# Altium PCB MU-RK3576J-MB.PcbDoc (part 2 of 2)
Units mm, origin at the board's own origin, x right, y up, seen from the top; angles counter-clockwise.
Board outline 110 x 90 mm, 10 copper layers (GTL_TOP_Hi, G1_L2_GND, G2_L3_GND, G3_L4_Hi, G4_L5_GND_PWR, G5_L6_GND_PWR, G6_L7_Hi, G7_L8_GND_PWR, G8_L9_GND, GBL_BOTTOM_Hi), stack 1.848 mm thick; 5 components, 737 nets, 20 pads, 0 vias.
Unrouted connection lines stored in the file: 705.
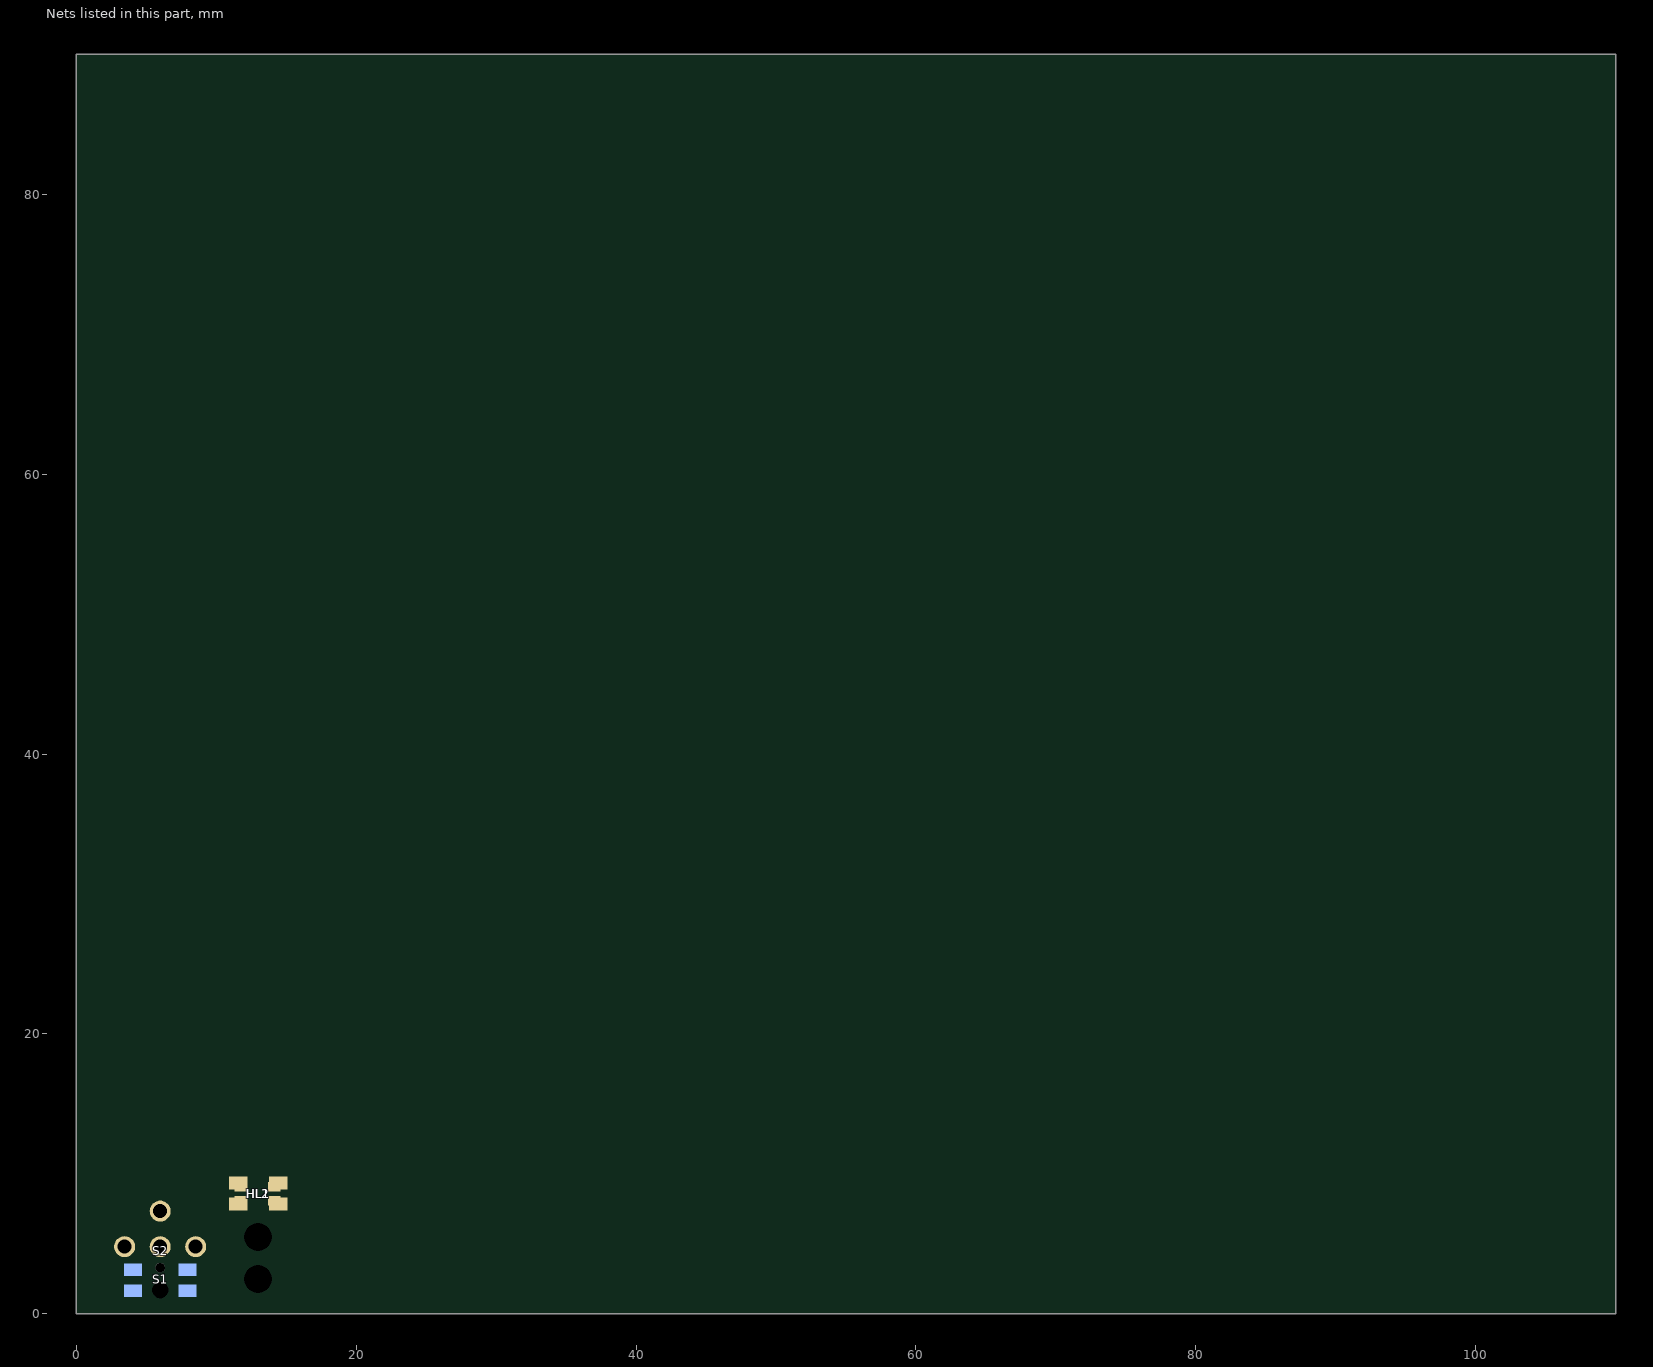
[diagram p2: the nets of this part, all layers, seen from the top]

## Part data
HL1: "20mA 无色透明透镜 -40℃~+85℃ Common anode 正贴 RGB 45mW SMD2835-4P Light Emitting Diodes (LED) ROHS", Manufacturer=XINGLIGHT, Check=False, NameFromManufacturer=XL-B3528RGBC-BM, Part Number=XL-B3528RGBC-BM
HL2: "25mA -30℃~+85℃ 正贴 RGB 120° 1206 Light Emitting Diodes (LED) ROHS", Manufacturer=XINGLIGHT, Check=False, NameFromManufacturer=XL-3216RGBC, Part Number=XL-3216RGBC
S1: "Switch", Manufacturer="KLS Electronic", Temperature=-30°C~70°C, Check=False, ComponentLink1Description=DATASHEET, ComponentLink1URL=https://www.chipdip.ru/product0/8010518403, Datasheet=Datasheets/switch/20150508141012KLS7-TS5401.pdf, Last changed=27.10.2022, NameFromManufacturer=L-KLS7-TS5401-1.35-250-T, Part Number=L-KLS7-TS5401-1.35-250-T, Place=T
S2: Manufacturer="FVWIN Electronics", Check=False, NameFromManufacturer=SW-LEDX4-7-2_54, Part Number=SW-LEDX4-7-2_54
X32: Manufacturer="Kang Yang", Check=False, NameFromManufacturer=LEM-195, Part Number=LEM-195

## Nets (pads, with @x,y where several pads share a name; then routed paths per layer and width w, separated by ;. In a path a pad name is that pad's centre, name@x,y a point inside that pad or via, vN(x,y) a via of type N, cw(c..) or ccw(c..) an arc to the next point about the centre after c; other vN are vias at no path point)
+0.9V_AVDD_MIPI: 
+0.9V_VDD_GPU: 
+0.9V_VDD_GPU_FB: 
+0.9V_VDD_LOGIC: 
+0.9V_VDD_LOGIC_FB: 
+0.9V_VDD_NPU: 
+0.9V_VDD_NPU_FB: 
+0.9V_VDDA: 
+0.9V_VDDA_IMAGE: 
+0.9V_VDDA_PMU: 
+1.1V_VDD_DDR: 
+1.5V_mPCIe: 
+1.8V_AVDD_MIPI: 
+1.8V_MCU: 
+1.8V_PLL_VDDA: 
+1.8V_VCC: 
+1.8V_VCC_PHY0_IO: 
+1.8V_VCC_PHY1_IO: 
+1.8V_VCCA: 
+1.8V_VCCA_IMAGE: 
+1.8V_VCCA_PMU: 
+1.8V_VDD_PLL_OSC: 
+1V_VCC_PHY0: 
+1V_VCC_PHY1: 
+1V_VDD_CPU: 
+3.3V_MCU: 
+3.3V_USB_DBG: 
+3.3V_VCC: 
+3.3V_VCC_GPS: 
+3.3V_VCC_PMU: 
+3.3V_VCC_SD: 
+3.3V_VCC_SYS: HL1.2 HL2.3
+3.3V_VCCIO: 
+3.3V_VCCIO_SD: 
+5V_OUT: 
+5V_VBUS_DBG: 
+5V_VCC_SYS: 
+5V_VCC_SYS_OUT: 
+5V_VCC_USB: 
+5V_VCC_USB_AUDIO: 
+5V_WDT: 
+VDC_IN_EXT: 
+VDC_IN_MAIN: 
+VDD_PD: 
A_DRAM_CA0: 
A_DRAM_CA1: 
A_DRAM_CA2: 
A_DRAM_CA3: 
A_DRAM_CA4: 
A_DRAM_CA5: 
A_DRAM_CKE0: 
A_DRAM_CKE1: 
A_DRAM_CLK_N: 
A_DRAM_CLK_P: 
A_DRAM_CS0: 
A_DRAM_CS1: 
A_DRAM_DATA0: 
A_DRAM_DATA1: 
A_DRAM_DATA2: 
A_DRAM_DATA3: 
A_DRAM_DATA4: 
A_DRAM_DATA5: 
A_DRAM_DATA6: 
A_DRAM_DATA7: 
A_DRAM_DATA8: 
A_DRAM_DATA9: 
A_DRAM_DATA10: 
A_DRAM_DATA11: 
A_DRAM_DATA12: 
A_DRAM_DATA13: 
A_DRAM_DATA14: 
A_DRAM_DATA15: 
A_DRAM_DMI0: 
A_DRAM_DMI1: 
A_DRAM_DQS0_N: 
A_DRAM_DQS0_P: 
A_DRAM_DQS1_N: 
A_DRAM_DQS1_P: 
A_DRAM_ODT_CA: 
ADC1: 
"ADC PMIC_BMC": 
"ADC VDC_BMC": 
ADC_BMC: 
AUDIO_L: 
AUDIO_R: 
B_DRAM_CA0: 
B_DRAM_CA1: 
B_DRAM_CA2: 
B_DRAM_CA3: 
B_DRAM_CA4: 
B_DRAM_CA5: 
B_DRAM_CKE0: 
B_DRAM_CKE1: 
B_DRAM_CLK_N: 
B_DRAM_CLK_P: 
B_DRAM_CS0: 
B_DRAM_CS1: 
B_DRAM_DATA0: 
B_DRAM_DATA1: 
B_DRAM_DATA2: 
B_DRAM_DATA3: 
B_DRAM_DATA4: 
B_DRAM_DATA5: 
B_DRAM_DATA6: 
B_DRAM_DATA7: 
B_DRAM_DATA8: 
B_DRAM_DATA9: 
B_DRAM_DATA10: 
B_DRAM_DATA11: 
B_DRAM_DATA12: 
B_DRAM_DATA13: 
B_DRAM_DATA14: 
B_DRAM_DATA15: 
B_DRAM_DMI0: 
B_DRAM_DMI1: 
B_DRAM_DQS0_N: 
B_DRAM_DQS0_P: 
B_DRAM_DQS1_N: 
B_DRAM_DQS1_P: 
B_DRAM_ODT_CA: 
BMC_CTRL.OP_STATE: 
BMC_CTRL.OTG_DIS: 
BMC_CTRL.RESETn: 
BMC_QSPI_CS: 
BMC_QSPI_D0: 
BMC_QSPI_D1: 
BMC_QSPI_D2: 
BMC_QSPI_D3: 
BMC_QSPI_SCLK: 
BMC_QSPI_SEL: 
BMC_RECOVERY: 
BOOT_SEL0#: 
BOOT_SEL1#: 
BOOT_SEL2#: 
BT_EN: 
BT_EN_HOST: 
BT_UART8_CTS: 
BT_UART8_RTS: 
BT_UART8_RX: 
BT_UART8_TX: 
BT_WAKE: 
BT_WAKE_HOST: 
CAM_I2C4.CAM_I2C4_SCL: 
CAM_I2C4.CAM_I2C4_SDA: 
CAM_IO0: 
CAM_IO1: 
CH_D_N: 
CH_D_P: 
CLK_100M0_N: 
CLK_100M0_P: 
CLK_100M1_N: 
CLK_100M1_P: 
CLK_100M2_N: 
CLK_100M2_P: 
CLK_100M3_N: 
CLK_100M3_P: 
DDR_RZQ: 
DISCHARGE: 
DISP_CTRL.DISP_INT: 
DISP_CTRL.DISP_PWM: 
DISP_CTRL.DISP_RST: 
DISP_CTRL.DISP_STBYB: 
DRAM_RESETn: 
DREG3.3V: 
EEPROM_CTRL.EEPROM_WP_CPU_0: 
EEPROM_CTRL.EEPROM_WP_CPU_1: 
EEPROM_I2C3.EEPROM_I2C3_I2C3_SCL: 
EEPROM_I2C3.EEPROM_I2C3_I2C3_SDA: 
EEPROM_WP: 
eMMC_CLKOUT: 
eMMC_CMD: 
eMMC_D0: 
eMMC_D1: 
eMMC_D2: 
eMMC_D3: 
eMMC_D4: 
eMMC_D5: 
eMMC_D6: 
eMMC_D7: 
eMMC_DATA_STROBE: 
eMMC_DIS: 
eMMC_RSTn: 
eMMC_VDDI: 
EN_SS: 
EXT_GND1: 
EXT_GND2: 
FQSPI_CS: 
FQSPI_D0: 
FQSPI_D1: 
FQSPI_D2: 
FQSPI_D3: 
FQSPI_FLASH.FQSPI_SCLK: 
GMAC0_CTRL.PHY0_CLKOUT: 
GMAC0_CTRL.PHY0_INT: 
GMAC0_CTRL.PHY0_MDIO: 
GMAC0_CTRL.PHY0_RSTn: 
GMAC0_CTRL.PHY1_MDC: 
GMAC0_RX.GMAC0_RXCLK: 
GMAC0_RX.GMAC0_RXD0: 
GMAC0_RX.GMAC0_RXD1: 
GMAC0_RX.GMAC0_RXD2: 
GMAC0_RX.GMAC0_RXD3: 
GMAC0_RX.GMAC0_RXDV_CRS: 
GMAC0_TX.GMAC0_TXCLK: 
GMAC0_TX.GMAC0_TXD0: 
GMAC0_TX.GMAC0_TXD1: 
GMAC0_TX.GMAC0_TXD2: 
GMAC0_TX.GMAC0_TXD3: 
GMAC0_TX.GMAC0_TXEN: 
GMAC1_CTRL.PHY1_CLKOUT: 
GMAC1_CTRL.PHY1_INT: 
GMAC1_CTRL.PHY1_MDC: 
GMAC1_CTRL.PHY1_MDIO: 
GMAC1_CTRL.PHY1_RSTn: 
GMAC1_RX.GMAC1_RXCLK: 
GMAC1_RX.GMAC1_RXD0: 
GMAC1_RX.GMAC1_RXD1: 
GMAC1_RX.GMAC1_RXD2: 
GMAC1_RX.GMAC1_RXD3: 
GMAC1_RX.GMAC1_RXDV_CRS: 
GMAC1_TX.GMAC1_TXCLK: 
GMAC1_TX.GMAC1_TXD0: 
GMAC1_TX.GMAC1_TXD1: 
GMAC1_TX.GMAC1_TXD2: 
GMAC1_TX.GMAC1_TXD3: 
GMAC1_TX.GMAC1_TXEN: 
GND: S2.2 S2.L2
GPS_ANT: 
GPS_CTRL.GPS_INT: 
GPS_CTRL.GPS_MODE: 
GPS_CTRL.GPS_PPS: 
GPS_CTRL.GPS_RST: 
GPS_CTRL.GPS_UART_RX: 
GPS_CTRL.GPS_UART_TX: 
HARD_RESETn: 
HDMI_5V: 
HDMI_CTRL.HDMI_TX_CEC: 
HDMI_CTRL.HDMI_TX_HPD: 
HDMI_CTRL.HDMI_TX_SCL: 
HDMI_CTRL.HDMI_TX_SDA: 
HDMI_PORT_TX0_N: 
HDMI_PORT_TX0_P: 
HDMI_PORT_TX1_N: 
HDMI_PORT_TX1_P: 
HDMI_PORT_TX2_N: 
HDMI_PORT_TX2_P: 
HDMI_PORT_TX_CEC: 
HDMI_PORT_TX_HPD: 
HDMI_PORT_TX_SCL: 
HDMI_PORT_TX_SDA: 
HDMI_PORT_TXCLK_N: 
HDMI_PORT_TXCLK_P: 
HDMI_TX0_N: 
HDMI_TX0_P: 
HDMI_TX1_N: 
HDMI_TX1_P: 
HDMI_TX2_N: 
HDMI_TX2_P: 
HDMI_TXCLK_N: 
HDMI_TXCLK_P: 
HOST_WAKE_BT: 
HP_SNS: 
HUB_XI: 
HUB_XO: 
I2S1_LRCK_TX_M0_RK809: 
I2S1_MCLK_M0_RK809: 
I2S1_SCLK_TX_M0_RK809: 
I2S1_SDI0_M0_RK809: 
I2S1_SDO0_M0_RK809: 
LED_B: 
LED_G: 
LED_R: 
LVDS_LANE.LVDS_TX0_CLK_N: 
LVDS_LANE.LVDS_TX0_CLK_P: 
LVDS_LANE.LVDS_TX0_D0_N: 
LVDS_LANE.LVDS_TX0_D0_P: 
LVDS_LANE.LVDS_TX0_D1_N: 
LVDS_LANE.LVDS_TX0_D1_P: 
LVDS_LANE.LVDS_TX0_D2_N: 
LVDS_LANE.LVDS_TX0_D2_P: 
LVDS_LANE.LVDS_TX0_D3_N: 
LVDS_LANE.LVDS_TX0_D3_P: 
M2_PCIE30_TX0_N: 
M2_PCIE30_TX0_P: 
MCU_NRESET: 
MCU_XIN24M: 
MCU_XOUT24M: 
MIC_BIAS: 
MIC_IN: 
MINIPCIE20_TX_N: 
MINIPCIE20_TX_P: 
MINIPCIE30_TX0_N: 
MINIPCIE30_TX0_P: 
MINIPCIE30_TX1_N: 
MINIPCIE30_TX1_P: 
MIPI_CSI.MIPI_CSI_RX_CLK0_N: 
MIPI_CSI.MIPI_CSI_RX_CLK0_P: 
MIPI_CSI.MIPI_CSI_RX_D0_N: 
MIPI_CSI.MIPI_CSI_RX_D0_P: 
MIPI_CSI.MIPI_CSI_RX_D1_N: 
MIPI_CSI.MIPI_CSI_RX_D1_P: 
MODE: 
mPCIe1_RST: 
mPCIe1_SIM_CLK: 
mPCIe1_SIM_IO: 
mPCIe1_SIM_RST: 
mPCIe1_SIMCON_VCC: 
mPCIe3_PCIE20.PCIE20_CLKREQ: 
mPCIe3_PCIE20.PCIE20_PERSTn: 
mPCIe3_PCIE20.PCIE20_REFCLK_N: 
mPCIe3_PCIE20.PCIE20_REFCLK_P: 
mPCIe3_PCIE20.PCIE20_RX_N: 
mPCIe3_PCIE20.PCIE20_RX_P: 
mPCIe3_PCIE20.PCIE20_TX_N: 
mPCIe3_PCIE20.PCIE20_TX_P: 
mPCIe3_PCIE30.PCIE30_1PERSTn: 
mPCIe3_PCIE30.PCIE30_REFCLK_N: 
mPCIe3_PCIE30.PCIE30_REFCLK_P: 
mPCIe3_PCIE30.PCIE30_RX0_N: 
mPCIe3_PCIE30.PCIE30_RX0_P: 
mPCIe3_PCIE30.PCIE30_RX1_N: 
mPCIe3_PCIE30.PCIE30_RX1_P: 
mPCIe3_PCIE30.PCIE30_TX0_N: 
mPCIe3_PCIE30.PCIE30_TX0_P: 
mPCIe3_PCIE30.PCIE30_TX1_N: 
mPCIe3_PCIE30.PCIE30_TX1_P: 
mPCIe3_PCIE30.PLL_OE0: 
mPCIe3_PCIE30_CTRL.PCIE2_CLK_N: 
mPCIe3_PCIE30_CTRL.PCIE2_CLK_P: 
mPCIe3_PCIE30_CTRL.PCIE30_0PERSTn: 
mPCIe3_PCIE30_CTRL.PCIE30_CLKREQ0: 
mPCIe3_PCIE30_CTRL.PCIE30_CLKREQ1: 
mPCIe3_PCIE30_CTRL.PCIE30_WAKEn: 
mPCIe3_SPI3.SPI3_CLK: 
mPCIe3_SPI3.SPI3_CS0: 
mPCIe3_SPI3.SPI3_MISO: 
mPCIe3_SPI3.SPI3_MOSI: 
mPCIE30.MUX_mPCIE30_RX0_N: 
mPCIE30.MUX_mPCIE30_RX0_P: 
mPCIE30.MUX_mPCIE30_TX0_N: 
mPCIE30.MUX_mPCIE30_TX0_P: 
mPCIE30.PCIE30_CLKREQ2: 
mPCIe_GPIO.SIM_SEL: 
mPCIe_I2C.mPCIe_I2C_SCL: 
mPCIe_I2C.mPCIe_I2C_SDA: 
MSEL: 
MUX_M2_PCIE30_RX0_N: 
MUX_M2_PCIE30_RX0_P: 
MUX_M2_PCIE30_TX0_N: 
MUX_M2_PCIE30_TX0_P: 
NetA2_5: 
NetA2_9: 
NetA2_14: 
NetA2_18: 
NetBAT1_1: 
NetBQ5_2: 
NetBQ9_4: 
NetC9_1: 
NetC47_2: 
NetC92_2: 
NetC97_2: 
NetC98_2: 
NetC99_1: 
NetC100_2: 
NetC101_2: 
NetC102_1: 
NetC102_2: 
NetC103_2: 
NetC121_2: 
NetC134_2: 
NetC135_1: 
NetC135_2: 
NetC136_1: 
NetC136_2: 
NetC148_2: 
NetC149_1: 
NetC158_2: 
NetC161_2: 
NetC164_2: 
NetC166_2: 
NetC192_2: 
NetC196_2: 
NetC209_2: 
NetC213_2: 
NetC223_2: 
NetC229_2: 
NetC235_2: S1.1 S1.2
NetC236_2: S2.1
NetC257_1: 
NetC257_2: 
NetC275_1: 
NetC281_2: 
NetC287_2: 
NetC291_1: 
NetC300_2: 
NetC301_2: 
NetC307_2: 
NetC313_2: 
NetC325_1: 
NetC338_1: 
NetC365_1: 
NetC366_1: 
NetC372_1: 
NetC372_2: 
NetC375_2: 
NetC380_2: 
NetC402_1: 
NetC404_2: 
NetC418_1: 
NetC419_2: 
NetC420_2: 
NetC421_2: 
NetC422_2: 
NetC423_2: 
NetC424_2: 
NetD1_AA18: 
NetD1_AF6: 
NetD1_AF27: 
NetD1_U19: 
NetD2_A5: 
NetD2_A8: 
NetD4_1: 
NetD4_2: 
NetD4_9: 
NetD4_12: 
NetD4_25: 
NetD4_27: 
NetD4_53: 
NetD4_59: 
NetD4_65: 
NetD4_68: 
NetD5_3: 
NetD5_4: 
NetD6_A2: 
NetD6_D3: 
NetD7_3: 
NetD7_5: 
NetD8_5: 
NetD9_1: 
NetD9_4: 
NetD10_2: 
NetD10_3: 
NetD10_9: 
NetD11_M6: 
NetD12_30: 
NetD12_35: 
NetD13_30: 
NetD13_35: 
NetD13_39: 
NetD15_1: 
NetD16_3: 
NetD17_3: 
NetD18_7: 
NetD19_1: 
NetD19_3: 
NetD19_5: 
NetD21_10: 
NetD22_10: 
NetD22_11: 
NetD22_12: 
NetD22_31: 
NetD22_32: 
NetD24_25: 
NetD26_1: 
NetD27_5: 
NetD29_2: 
NetD30_8: 
NetD31_20: 
NetD31_29: 
NetD31_31: 
NetD31_36: 
NetD31_42: 
NetD31_43: 
NetD32_4: 
NetD32_6: 
NetD32_7: 
NetD32_9: 
NetD32_17: 
NetD35_1: 
NetD35_3: 
NetD35_4: 
NetD35_6: 
NetHL1_1: HL1.1 HL2.4
NetHL1_3: HL1.3 HL2.2
NetHL1_4: HL1.4 HL2.1
NetR7_1: 
NetR14_1: 
NetR14_2: 
NetR23_1: 
NetR23_2: 
NetR48_1: 
NetR67_1: 
NetR70_1: 
NetR111_1: 
NetR111_2: 
NetR115_1: 
NetR122_1: 
NetR122_2: 
NetR123_1: 
NetR168_2: 
NetR169_2: 
NetR170_2: 
NetR172_2: 
NetR173_2: 
NetR174_2: 
NetR175_1: 
NetR195_2: S2.L1
NetR203_2: 
NetR218_1: 
NetR219_1: 
NetR220_1: 
NetR289_1: 
NetR290_1: 
NetR310_1: 
NetR313_2: 
NetR317_1: 
NetR323_1: 
NetR324_2: 
NetR333_1: 
NetR333_2: 
NetR335_1: 
NetR340_1: 
NetR351_1: 
NetR352_1: 
NetR353_1: 
NetR355_2: 
NetR374_2: 
NetR376_2: 
NetR383_2: 
NetR385_2: 
NetR389_1: S1.3 S1.4
NetR397_2: 
NetR398_1: 
NetR403_1: 
NetR404_2: 
NetR419_1: 
NetR420_2: 
NetR429_1: 
NetVD6_1: 
PCIE0_CLK_N: 
PCIE0_CLK_P: 
PCIE1_CLK_N: 
PCIE1_CLK_P: 
PDM_CLK0_M0_RK809: 
PDSW: 
PHY0_LED0: 
PHY0_LED1: 
PHY0_LED2: 
PHY0_MDI0_N: 
PHY0_MDI0_P: 
PHY0_MDI1_N: 
PHY0_MDI1_P: 
PHY0_MDI2_N: 
PHY0_MDI2_P: 
PHY0_MDI3_N: 
PHY0_MDI3_P: 
PHY0_PHYAD0: 
PHY0_PHYAD1: 
PHY0_PHYAD2: 
PHY0_RSET: 
PHY0_RXD0: 
PHY0_RXD1: 
PHY0_RXD2: 
PHY0_TXCLK: 
PHY0_TXD0: 
PHY0_TXD1: 
PHY0_TXD2: 
PHY0_TXD3: 
PHY0_TXEN: 
PHY0_XTALIN: 
PHY0_XTALOUT: 
PHY1_LED0: 
PHY1_LED1: 
PHY1_LED2: 
PHY1_MDI0_N: 
PHY1_MDI0_P: 
PHY1_MDI1_N: 
PHY1_MDI1_P: 
PHY1_MDI2_N: 
PHY1_MDI2_P: 
PHY1_MDI3_N: 
PHY1_MDI3_P: 
PHY1_PHYAD0: 
PHY1_PHYAD1: 
PHY1_PHYAD2: 
PHY1_RXD0: 
PHY1_RXD1: 
PHY1_RXD2: 
PHY1_TXCLK: 
PHY1_TXD0: 
PHY1_TXD1: 
PHY1_TXD2: 
PHY1_TXD3: 
PHY1_TXEN: 
PHY1_XTALIN: 
PHY1_XTALOUT: 
PLL_OE1: 
PLL_OE2: 
PLL_OE3: 
PLL_XTALIN: 
PLL_XTALOUT: 
PMIC_EXT_EN: 
PMIC_I2C0_SCL: 
PMIC_I2C0_SDA: 
PMIC_INT_L: 
PMIC_PWRON: 
PMIC_SLEEP_H: 
PMIC_VDC: 
PWRSEL: 
QSPI_CS: 
QSPI_D0: 
QSPI_D1: 
QSPI_D2: 
QSPI_D3: 
QSPI_FLASH.QSPI_SCLK: 
RESET_IN: 
RK_XIN: 
RK_XOUT: 
RTC_32KHZ: 
RTC_CTRL.RTC_I2C5_SCL: 
RTC_CTRL.RTC_I2C5_SDA: 
RTC_INT#: 
RTC_OSCI: 
RTC_OSCO: 
SD_DIS: 
SD_SDIO.SDMMC0_CLK: 
SD_SDIO.SDMMC0_CMD: 
SD_SDIO.SDMMC0_D0: 
SD_SDIO.SDMMC0_D1: 
SD_SDIO.SDMMC0_D2: 
SD_SDIO.SDMMC0_D3: 
SD_SDIO.SDMMC0_DET: 
SDMMC0_CLK_SD: 
SH2: 
SH_1: 
SH_3: 
SIM1_CLK: 
SIM1_DET: 
SIM1_IO: 
SIM1_RST: 
SIM1_VCC: 
SIM1_VPP: 
SIM2_CLK: 
SIM2_DET: 
SIM2_IO: 
SIM2_RST: 
SIM2_VCC: 
SIMCON1_CLK: 
SIMCON1_IO: 
SIMCON1_RST: 
SIMCON2_CLK: 
SIMCON2_IO: 
SIMCON2_RST: 
SIMCON2_VPP: 
SWCLK: 
SWDIO: 
TSADC_SHUT: 
UART2_RX_DEBUG: 
UART2_TX_DEBUG: 
USB2_AUDIO_D_N: 
USB2_AUDIO_D_P: 
USB2_HUB_D_N: 
USB2_HUB_D_P: 
USB2_LTE1_D_N: 
USB2_LTE1_D_P: 
USB2_LTE2_D_N: 
USB2_LTE2_D_P: 
USB2_mPCIe.USB2_mPCIe_D_N: 
USB2_mPCIe.USB2_mPCIe_D_P: 
USB2_RS_D_N: 
USB2_RS_D_P: 
USB3_HOST1_D_N: 
USB3_HOST1_D_P: 
USB3_HOST1_EN: 
USB3_HOST1_SSRX_N: 
USB3_HOST1_SSRX_P: 
USB3_HOST1_SSTX_N: 
USB3_HOST1_SSTX_P: 
USB3_HOST1SSTX_N: 
USB3_HOST1SSTX_P: 
USB3_OTG0_D_N: 
USB3_OTG0_D_P: 
USB3_OTG0_EN: 
USB3_OTG0_ID: 
USB3_OTG0_SSRX_N: 
USB3_OTG0_SSRX_P: 
USB3_OTG0_SSTX_N: 
USB3_OTG0_SSTX_P: 
USB3_OTG0_VBUSDET: 
USB3_OTG0SSTX_N: 
USB3_OTG0SSTX_P: 
USB3HOST1_D_N: 
USB3HOST1_D_P: 
USB3OTG0_D_N: 
USB3OTG0_D_P: 
USB_AUDIO_D_N: 
USB_AUDIO_D_P: 
USB_BMC_D_N: 
USB_BMC_D_P: 
USB_CONSL_D_N: 
USB_CONSL_D_P: 
USB_CONSL_RSVD_D_N: 
USB_CONSL_RSVD_D_P: 
USB_DBG.USB_DBG_D_N: 
USB_DBG.USB_DBG_D_P: 
USB_PD_CC1: 
USB_PD_CC2: 
USB_PD_D_N: 
USB_PD_D_P: 
USB_SEL: 
USB_UART_DBG.USB_UART_DBG_D_N: 
USB_UART_DBG.USB_UART_DBG_D_P: 
USBR_BMC_D_N: 
USBR_BMC_D_P: 
VBUS_USB3_HOST1: 
VBUS_USB3_OTG0: 
VCC_3.3V_USB: 
VCC_RTC: 
VDD_CPU_COM: 
VDDA_0.9V_USB: 
VDDA_1.8V_USB: 
VIN_PWR_BAD#: 
WAKE_BT: 
WDT_CTRL.WDT_EN: 
WDT_CTRL.WDT_WDI: 
WIFIBT_RTC_32KHZ: 
WL_BT_ANT: 
WL_BT_CTRL.WL_EN: 
WL_BT_CTRL.WL_HOST_WAKE: 
WL_SDIO.WL_SDIO_CLK: 
WL_SDIO.WL_SDIO_CMD: 
WL_SDIO.WL_SDIO_D0: 
WL_SDIO.WL_SDIO_D1: 
WL_SDIO.WL_SDIO_D2: 
WL_SDIO.WL_SDIO_D3: 
XIN24M: 
XOUT24M: 
pads on no net: S1. S2. X32.1 X32.2

## Keep-outs
Keep-Out Layer:
  the board outline again, w0.2

## Silkscreen, mask and mechanical layers (free items; w line width, h text height)
Bottom Overlay:
  circle w0.2: c8.909,3.461 r0.077
Top Assy:
  circle w0.1: c106,24.5 r3.453
Top Selekt:
  text "SET2|Superlayer=MechanicalLayer7|Wsuperlayer=MechanicalLayer8|Layergrid=MechanicalLayer9|Werase=MechanicalLayer11|Layermark=MechanicalLayer12|Layerstamp=MechanicalLayer13|Thinline=0,18|Basicline=0,6|Gridline=0,18|Boardline=0,6|Contourpolygonline=0,6|PcbGridStep=1|PcbGridCleareanceAtView=0|PcbGridNumberEach=l4|PcbGridLineEach=l2|PcbGridCountSecondaryStrip=1|PcbGridEnabledStrip=True|PcbSignalGridEnabled=True|PcbSignalShowBukva=True|RealSignalLayerNames=False|PcbGridEnabledBothSide=False|PcbPolarGridEnabled=False|PcbPolarGridAngleStep=10|PcbPolarGridRadialStep=10|PcbPolarGridCenterPcbGrid=False|SilkShowPad=True|SilkViewName=Слой маркировки|SilkShowHole=True|SilkShowAxis=True|SilkShowBukva=True|SilkShowGrid=False|SolderShowGrid=False|SolderViewName=Слой маски|SolderShowAxis=False|SolderShowBukva=False|MainViewShowGrid=False|MainViewUseShapesDrill=False|ShowBukvaOnSboky=True|Density=2,2|CustomHoleSizeFactor=1|TableName=Таблица 1|RazrezWidth=100|RealLayerNames=False|RazrezShowBukva=False|RazrezBukva=В-В|Sher=Rz 160|Asstoplayer=MechanicalLayer1|Asstoplayer2=None|Assbottomlayer=MechanicalLayer2|Assbottomlayer2=None|AssMinDiameterHoles=2|AssDim=False|AssMech=False|AssSilk=False|AssComponentSilk=False|AssFreeSilk=False|AssSmdPads=False|AssGridEnable=False|Mirror=Horisontal|PcbGridFontSize=5|PcbGridCenterZero=False|TTStampDistance=12|MainFontSize=5|PolyShtrihEnable=True|RegionShtrihEnable=False|PolyStep=2|PcbDrillDrawingGridEnabled=False|PcbDrillDrawingViewName=Слой сверловки|PcbDrillDrawingShowBukva=False|PcbDrillDrawingShowAxis=False|PcbSignalLayersUseDrill=False|PcbSignalLayersUseShapesDrill=False|PcbSignalLayersShowAxis=False" at -42.201,-57.45 h0
Fab Notes:
  drawing of 866 lines, arcs and shapes, not listed
  text "Layer" at 133.302,96.346 h1.52
  text "Name" at 143.713,96.346 h1.52
  text "Material" at 167.329,96.346 h1.52
  text "Thickness" at 191.198,96.346 h1.52
  text "Constant" at 207.704,96.346 h1.52
  text "Board Layer Stack" at 222.179,96.346 h1.52
  text "Top Overlay" at 143.713,93.298 h1.52
  text "Top Solder" at 143.713,90.25 h1.52
  text "Solder Resist" at 167.329,90.25 h1.52
  text "0.025mm" at 191.198,90.25 h1.52
  text "3.5" at 207.704,90.25 h1.52
  text "1" at 133.302,87.202 h1.52
  text "GTL_TOP_Hi" at 143.713,87.202 h1.52
  text "Cu" at 167.329,87.202 h1.52
  text "0.018mm" at 191.198,87.202 h1.52
  text "Dielectric 1" at 143.713,84.154 h1.52
  text "FR4_HiTg170 PR" at 167.329,84.154 h1.52
  text "0.045mm" at 191.198,84.154 h1.52
  text "3.9" at 207.704,84.154 h1.52
  text "Dielectric1" at 143.713,81.106 h1.52
  text "FR4_HiTg170 PR" at 167.329,81.106 h1.52
  text "0.045mm" at 191.198,81.106 h1.52
  text "3.9" at 207.704,81.106 h1.52
  text "2" at 133.302,78.058 h1.52
  text "G1_L2_GND" at 143.713,78.058 h1.52
  text "Cu" at 167.329,78.058 h1.52
  text "0.035mm" at 191.198,78.058 h1.52
  text "Dielectric 2" at 143.713,75.01 h1.52
  text "FR4_HiTg170 PR" at 167.329,75.01 h1.52
  text "0.069mm" at 191.198,75.01 h1.52
  text "4.2" at 207.704,75.01 h1.52
  text "Dielectric2" at 143.713,71.962 h1.52
  text "FR4_HiTg170 PR" at 167.329,71.962 h1.52
  text "0.069mm" at 191.198,71.962 h1.52
  text "4.2" at 207.704,71.962 h1.52
  text "3" at 133.302,68.914 h1.52
  text "G2_L3_GND" at 143.713,68.914 h1.52
  text "Cu" at 167.329,68.914 h1.52
  text "0.035mm" at 191.198,68.914 h1.52
  text "Dielectric3" at 143.713,65.866 h1.52
  text "FR4 HiTg170" at 167.329,65.866 h1.52
  text "0.250mm" at 191.198,65.866 h1.52
  text "4.3" at 207.704,65.866 h1.52
  text "4" at 133.302,62.818 h1.52
  text "G3_L4_Hi" at 143.713,62.818 h1.52
  text "Cu" at 167.329,62.818 h1.52
  text "0.035mm" at 191.198,62.818 h1.52
  text "Dielectric 4" at 143.713,59.77 h1.52
  text "FR4_HiTg170 PR" at 167.329,59.77 h1.52
  text "0.069mm" at 191.198,59.77 h1.52
  text "4.2" at 207.704,59.77 h1.52
  text "Dielectric4" at 143.713,56.722 h1.52
  text "FR4_HiTg170 PR" at 167.329,56.722 h1.52
  text "0.069mm" at 191.198,56.722 h1.52
  text "4.2" at 207.704,56.722 h1.52
  text "5" at 133.302,53.674 h1.52
  text "G4_L5_GND_PWR" at 143.713,53.674 h1.52
  text "Cu" at 167.329,53.674 h1.52
  text "0.035mm" at 191.198,53.674 h1.52
  text "Dielectric5" at 143.713,50.626 h1.52
  text "FR4 HiTg170" at 167.329,50.626 h1.52
  text "0.300mm" at 191.198,50.626 h1.52
  text "4.5" at 207.704,50.626 h1.52
  text "6" at 133.302,47.578 h1.52
  text "G5_L6_GND_PWR" at 143.713,47.578 h1.52
  text "Cu" at 167.329,47.578 h1.52
  text "0.035mm" at 191.198,47.578 h1.52
  text "Dielectric6" at 143.713,44.53 h1.52
  text "FR4_HiTg170 PR" at 167.329,44.53 h1.52
  text "0.069mm" at 191.198,44.53 h1.52
  text "4.2" at 207.704,44.53 h1.52
  text "Dielectric 6" at 143.713,41.482 h1.52
  text "FR4_HiTg170 PR" at 167.329,41.482 h1.52
  text "0.069mm" at 191.198,41.482 h1.52
  text "4.2" at 207.704,41.482 h1.52
  text "7" at 133.302,38.434 h1.52
  text "G6_L7_Hi" at 143.713,38.434 h1.52
  text "Cu" at 167.329,38.434 h1.52
  text "0.035mm" at 191.198,38.434 h1.52
  text "Dielectric7" at 143.713,35.386 h1.52
  text "FR4 HiTg170" at 167.329,35.386 h1.52
  text "0.250mm" at 191.198,35.386 h1.52
  text "4.3" at 207.704,35.386 h1.52
  text "8" at 133.302,32.338 h1.52
  text "G7_L8_GND_PWR" at 143.713,32.338 h1.52
  text "Cu" at 167.329,32.338 h1.52
  text "0.035mm" at 191.198,32.338 h1.52
  text "Dielectric 8" at 143.713,29.29 h1.52
  text "FR4_HiTg170 PR" at 167.329,29.29 h1.52
  text "0.069mm" at 191.198,29.29 h1.52
  text "4.2" at 207.704,29.29 h1.52
  text "Dielectric8" at 143.713,26.242 h1.52
  text "FR4_HiTg170 PR" at 167.329,26.242 h1.52
  text "0.069mm" at 191.198,26.242 h1.52
  text "4.2" at 207.704,26.242 h1.52
  text "9" at 133.302,23.194 h1.52
  text "G8_L9_GND" at 143.713,23.194 h1.52
  text "Cu" at 167.329,23.194 h1.52
  text "0.035mm" at 191.198,23.194 h1.52
  text "Dielectric9" at 143.713,20.146 h1.52
  text "FR4_HiTg170 PR" at 167.329,20.146 h1.52
  text "0.045mm" at 191.198,20.146 h1.52
  text "3.9" at 207.704,20.146 h1.52
  text "Dielectric 9" at 143.713,17.098 h1.52
  text "FR4_HiTg170 PR" at 167.329,17.098 h1.52
  text "0.045mm" at 191.198,17.098 h1.52
  text "3.9" at 207.704,17.098 h1.52
  text "10" at 133.302,14.05 h1.52
  text "GBL_BOTTOM_Hi" at 143.713,14.05 h1.52
  text "Cu" at 167.329,14.05 h1.52
  text "0.018mm" at 191.198,14.05 h1.52
  text "Bottom Solder" at 143.713,11.002 h1.52
  text "Solder Resist" at 167.329,11.002 h1.52
  text "0.025mm" at 191.198,11.002 h1.52
  text "3.5" at 207.704,11.002 h1.52
  text "Bottom Overlay" at 143.713,7.954 h1.52
  text "Total board thickness:" at 133.302,4.906 h1.52
  text "1.899mm" at 191.198,4.906 h1.52
  text "PCB SPECIFICATIONS :" at 131.875,-7.75 h3
  text "A.   MATERIAL :" at 131.875,-11.75 h3
  text "FR-4" at 170.375,-11.75 h3
  text "X   TG-170" at 186.875,-11.75 h3
  text "TG-150" at 205.125,-11.75 h3
  text "TG-140" at 221.125,-11.75 h3
  text "B.   MATERIAL FAMILY :" at 131.875,-14.75 h3
  text "N/A" at 170.375,-14.75 h3
  text "C.   SOLDERMASK COLOR :" at 131.875,-17.75 h3
  text "BLUE" at 170.375,-17.75 h3
  text "WHITE" at 186.875,-17.75 h3
  text "RED" at 205.125,-17.75 h3
  text "X  BLACK" at 221.125,-17.75 h3
  text "GREEN" at 236.33,-17.884 h3
  text "D.   SILKSCREEN COLOR :" at 131.875,-20.75 h3
  text "X  WHITE" at 170.375,-20.75 h3
  text "YELLOW" at 186.875,-20.75 h3
  text "BLACK" at 205.125,-20.75 h3
  text "Blue ink PANTONE 2955" at 221.125,-20.75 h3
  text "E.   SURFACE FINISH :" at 131.875,-23.75 h3
  text "X  ENIG" at 170.375,-23.75 h3
  text "IMMERSION SILVER" at 186.875,-23.75 h3
  text "IMMERSION TIN" at 221.125,-23.75 h3
  text "HASL" at 170.375,-26.75 h3
  text "HASL (PB-FREE)" at 186.875,-26.75 h3
  text "GOLDEN FINGER" at 221.125,-26.75 h3
  text "F.   IMPEDANCE CONTROL :" at 131.875,-29.75 h3
  text "NO" at 170.375,-29.75 h3
  text "X  YES  (SEE IMPEDANCE TABLE FOR DETAIL INFORMATION)" at 186.875,-29.75 h3
  text "G.   THROUGH VIA :" at 131.875,-32.75 h3
  text "PLUG THE VIAS WHICH ARE COVERED WITH SOLDERMASK ONE OR TWO SIDE." at 170.375,-32.75 h3
  text "PLUG MATERIAL :" at 170.375,-35.75 h3
  text "X  SOLDERMASK" at 195.875,-35.75 h3
  text "NON-CONDUCTIVE EPOXY." at 221.125,-35.75 h3
  text "H.   STACK-UP :" at 131.875,-38.75 h3
  text "SEE LAYER STACK-UP SEQUENCE FOR OVERALL THICKNESS." at 170.375,-38.75 h3